# Altium PCB chavi-21.PcbDoc
Units mil, origin at the board's own origin, x right, y up, seen from the top; angles counter-clockwise.
Board outline 6000 x 4000 mil, 2 copper layers (Top Layer, Bottom Layer); 116 components, 79 nets, 381 pads, 0 vias.
Unrouted connection lines stored in the file: 264.
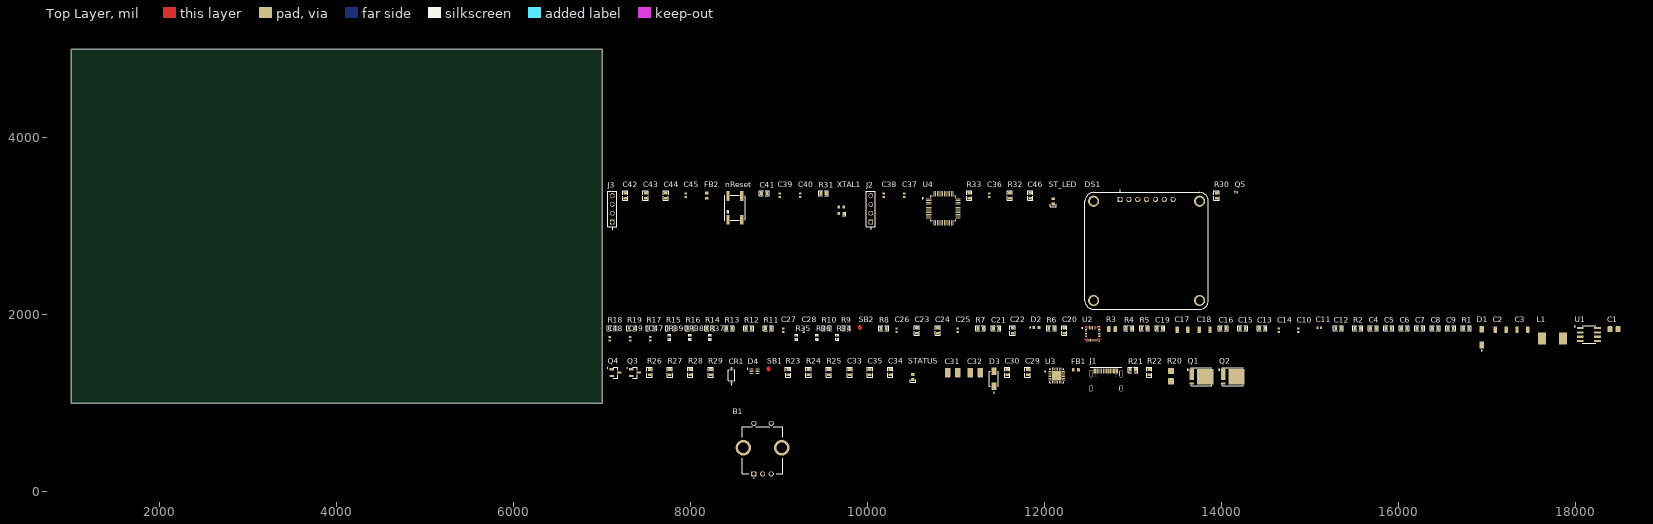
[diagram p0: Top Layer view]
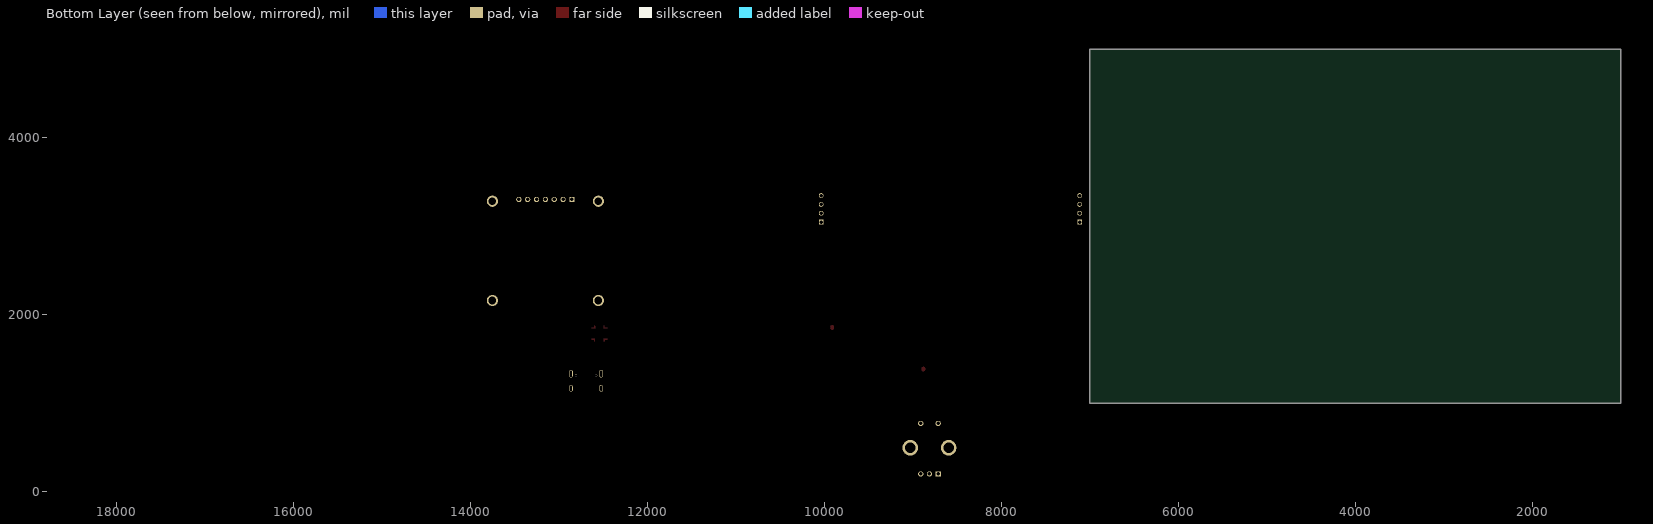
[diagram p1: Bottom Layer view, seen from below]

## Layer stack, top to bottom
Top Solder: solder mask 0.4, Solder Resist, Dk 3.5
Top Layer: signal copper 1.4
Dielectric 1: dielectric 12.6, FR-4, Dk 4.8
Bottom Layer: signal copper 1.4
Bottom Solder: solder mask 0.4, Solder Resist, Dk 3.5

## Board outline
1000,1000 7000,1000 7000,5000 1000,5000

## Design rules (kind name [scope] priority, off if disabled: settings)
Clearance [All] p1: gap=10 ignorepadtopadclearanceinfootprint=FALSE
DiffPairsRouting [All] p1: maxlimit=10 minlimit=10 mostfreqgap=10 toplayer_minwidth=15 toplayer_maxwidth=15 toplayer_prefwidth=15 bottomlayer_minwidth=15 bottomlayer_maxwidth=15 bottomlayer_prefwidth=15 maxuncoupledlength=500
PolygonConnect [All] p1: connectstyle=Relief reliefconductorwidth=10 reliefentries=4 polygonreliefangle="90 Angle" airgapwidth=10
RoutingVias [All] p1: holewidth=28 width=50 viastyle="Through Hole" minholewidth=28 minwidth=50 maxholewidth=28 maxwidth=50
SolderMaskExpansion [All] p1: expansion=4 istentingtop=FALSE
SupplyNets "Schematic Supply Nets_9" [InNet('VREG')] p1: voltage=0.000
SupplyNets "Schematic Supply Nets_8" [InNet('+VNEG')] p2: voltage=0.000
SupplyNets "Schematic Supply Nets_7" [InNet('GND')] p3: voltage=0.000
SupplyNets "Schematic Supply Nets_6" [InNet('+VBAT')] p4: voltage=0.000
SupplyNets "Schematic Supply Nets_5" [InNet('+3V3')] p5: voltage=0.000
SupplyNets "Schematic Supply Nets_4" [InNet('+PMID')] p6: voltage=0.000
SupplyNets "Schematic Supply Nets_3" [InNet('+VUSB')] p7: voltage=0.000
SupplyNets "Schematic Supply Nets_2" [InNet('+VSYS')] p8: voltage=0.000
SupplyNets "Schematic Supply Nets_1" [InNet('+V5')] p9: voltage=0.000
SupplyNets "Schematic Supply Nets" [InNet('+VOUT')] p10: voltage=0.000
Width [All] p1: maxlimit=10 minlimit=10 preferedwidth=10
29 further rules are at their usual default settings.

## Classes and differential pairs
component class stm32f103: B1 C36 C37 C38 C39 C40 C41 C42 C43 C44 C45 C46 C47 C48 C49 DS1 FB2 J2 J3 nReset Q5 R30 R31 R32 R33 R34 R35 R36 R37 R38 R39 ST_LED U4 XTAL1
component class bq25798: C1 C2 C3 C4 C5 C6 C7 C8 C9 C10 C11 C12 C13 C14 C15 C16 C17 C18 C19 C20 C21 C22 C23 C24 C25 C26 C27 C28 D1 D2 L1 L2 R1 R2 R3 R4 R5 R6 R7 R8 R9 R10 R11 R12 R13 R14 R15 R16 R17 R18 R19 SB2 U1 U2
component class ap33772s: C29 C30 C31 C32 C33 C34 C35 CR1 D3 D4 FB1 J1 Q1 Q2 Q3 Q4 R20 R21 R22 R23 R24 R25 R26 R27 R28 R29 SB1 STATUS U3
differential pair USB: +USB_P -USB_N

## Components (designator, comment, footprint, x,y, rotation, side; value= is the part's Value field where it differs from the comment)
B1 "EC11E18244AU" EC11E18244AU 8713.15,200 r0 top
C1 "100n 25V" CAP_0805 18430,1835 r0 top
C2 "47u 25V" CAP_1206 17150,1830 r0 top
C3 "47u 25V" CAP_1206 17395,1830 r0 top
C4 "10u 25V" CAP_0603 15710,1845 r0 top
C5 "10u 25V" CAP_0603 15885,1845 r0 top
C6 "10u 25V" CAP_0603 16060,1845 r0 top
C7 "10u 25V" CAP_0603 16235,1845 r0 top
C8 "10u 25V" CAP_0603 16410,1845 r0 top
C9 "10u 25V" CAP_0603 16585,1845 r0 top
C10 "100n 50V" CAP_0402 14865,1825 r90 top
C11 "100n 50V" CAP_0402 15100,1850 r0 top
C12 "10u 25V" CAP_0603 15315,1845 r0 top
C13 "1n" CAP_0603 14455,1845 r0 top
C14 "47p" CAP_0402 14645,1825 r90 top
C15 "47n 25V" CAP_0603 14235,1845 r0 top
C16 "47n 25V" CAP_0603 14015,1845 r0 top
C17 "4u7 50V" CAP_1206 13555,1830 r0 top
C18 "4u7 50V" CAP_1206 13805,1830 r0 top
C19 "10n" CAP_0603 13300,1845 r0 top
C20 "1n 25V" CAP_0603 12220,1820 r90 top
C21 "10u 25V" CAP_0603 11450,1845 r0 top
C22 "10u 25V" CAP_0603 11635,1820 r90 top
C23 "10u 25V" CAP_0603 10555,1820 r90 top
C24 "10u 25V" CAP_0603 10790,1820 r90 top
C25 "100n 50V" CAP_0402 11015,1825 r90 top
C26 "4u7 25V" CAP_0402 10325,1825 r90 top
C27 "100n 50V" CAP_0402 9045,1825 r90 top
C28 "100n 50V" CAP_0402 9275,1825 r90 top
C29 "100n X7R 50V" CAP_0603 11805,1350 r90 top
C30 "100n X7R 50V" CAP_0603 11575,1350 r90 top
C31 "10u X7R 50V" CAP_1210 10960,1345 r0 top
C32 "10u X7R 50V" CAP_1210 11215,1345 r0 top
C33 "100n X7R 50V" CAP_0603 9795,1350 r90 top
C34 "1u X7R 50V" CAP_0603 10255,1350 r90 top
C35 "100n X7R 50V" CAP_0603 10025,1350 r90 top
C36 "100n" CAP_0402 11370,3350 r90 top
C37 "10u" CAP_0402 10410,3350 r90 top
C38 "100n" CAP_0402 10180,3350 r90 top
C39 "10p" CAP_0402 9005,3350 r90 top
C40 "10p" CAP_0402 9235,3350 r90 top
C41 "100n" CAP_0603 8830,3370 r0 top
C42 "10n" CAP_0603 7260,3345 r90 top
C43 "1u" CAP_0603 7490,3345 r90 top
C44 "1u" CAP_0603 7720,3345 r90 top
C45 "100n" CAP_0402 7945,3350 r90 top
C46 "100n 50V" CAP_0603 11835,3345 r90 top
C47 "10n" CAP_0402 7545,1725 r90 top
C48 "10n" CAP_0402 7085,1725 r90 top
C49 "10n" CAP_0402 7315,1725 r90 top
CR1 "BAT48ZFILM" *SOD-123_STM 8460,1315 r90 top
D1 "Schottky Diode_3" DIOM5226X100N 16935,1745 r90 top
D2 "HSMA-C190" LED_HSMA-C190 11905,1855 r0 top
D3 "SS110" DIOM4325X250N 11425,1275 r90 top
D4 "SMF24CT1G" SOT65P210X110-6N 8720,1360 r0 top
DS1 "AOM12864A0-1.3BW-ANO" LCD_AOM12864A0-1.3BW-ANO 13150,2720 r0 top
FB1 "BLM18AG601SN1D" FB_0603 12350,1375 r0 top
FB2 "100R" FB_0603 8180,3345 r90 top
J1 "TYPE-C-31-M-12" TYPE-C-31-M-12 12690,1250 r0 top
J2 "st_debug" SAMTEC_TSW-104-08-T-S-LL 10035,3045 r90 top
J3 "uart_log" SAMTEC_TSW-104-08-T-S-LL 7115,3045 r90 top
L1 "6u8" ASPI-0630HI-6R8M-T15 17735,1730 r0 top
nReset "EVQQ2W03W" EVQQ2W03W 8500,3205 r0 top
Q1 "BSC019N06N" BSC014N04LSIATMA1 13770,1300 r0 top
Q2 "BSC019N06N" BSC014N04LSIATMA1 14125,1300 r0 top
Q3 "BSS138" SOT95P240X111-3N 7370,1345 r0 top
Q4 "BSS138" SOT95P240X111-3N 7150,1345 r0 top
Q5 "RV2C010UNT2L" DFN65P100X40-3L 14160,3380 r0 top
R1 "10k2" RES_0603 16760,1845 r0 top
R2 "332k" RES_0603 15535,1845 r0 top
R3 "68k1" RES_0805 12760,1835 r0 top
R4 "29.4k" RES_0603 12950,1845 r0 top
R5 "3k24" RES_0603 13125,1845 r0 top
R6 "1k2" RES_0603 12075,1845 r0 top
R7 "10k" RES_0603 11275,1845 r0 top
R8 "10k5 1%" RES_0603 10180,1845 r0 top
R9 "100R" RES_0603 9755,1845 r0 top
R10 "127k" RES_0603 9535,1845 r0 top
R11 "100k" RES_0603 8875,1845 r0 top
R12 "5k23" RES_0603 8655,1845 r0 top
R13 "30k1" RES_0603 8435,1845 r0 top
R14 "10k" RES_0603 8215,1845 r0 top
R15 "10k" RES_0603 7775,1845 r0 top
R16 "10k" RES_0603 7995,1845 r0 top
R17 "10k" RES_0603 7555,1845 r0 top
R18 "0R" RES_0603 7115,1845 r0 top
R19 "0R" RES_0603 7335,1845 r0 top
R20 "5m 1W 1%" RES_1206 13425,1305 r90 top
R21 "10R" RES_0603 12995,1375 r0 top
R22 "100R" RES_0603 13180,1350 r90 top
R23 "5k1" RES_0603 9100,1350 r90 top
R24 "5k1" RES_0603 9330,1350 r90 top
R25 "1k" RES_0603 9560,1350 r90 top
R26 "4k7" RES_0603 7535,1350 r90 top
R27 "4k7" RES_0603 7765,1350 r90 top
R28 "4k7" RES_0603 7995,1350 r90 top
R29 "4k7" RES_0603 8225,1350 r90 top
R30 "120R" RES_0603 13940,3345 r90 top
R31 "1k" RES_0603 9500,3370 r0 top
R32 "33R" RES_0603 11605,3345 r90 top
R33 "33R" RES_0603 11145,3345 r90 top
R34 "2k" RESC1005X04L 9655,1745 r90 top value=0R
R35 "10k" RESC1005X04L 9195,1745 r90 top value=0R
R36 "10k" RESC1005X04L 9425,1745 r90 top value=0R
R37 "470R" RESC1005X04L 8220,1745 r90 top value=0R
R38 "470R" RESC1005X04L 7990,1745 r90 top value=0R
R39 "470R" RESC1005X04L 7760,1745 r90 top value=0R
SB1 "Solderbridge" Solderbridge 8880,1385 r90 top
SB2 "Solderbridge" Solderbridge 9910,1855 r90 top
ST_LED "BLUE" LED_0603_BLUE 12095,3280 r90 top
STATUS "BLUE" LED_0603_BLUE 10510,1295 r90 top
U1 "TPS54331DR" SOIC127P599X175-8N 18145,1775 r0 top
U2 "BQ25798RQMR" IC_BQ25798RQMR 12540,1785 r0 top
U3 "AP33772S" IC_AP33772S 12135,1310 r0 top
U4 "STM32F103C8T6" QFP50P900X900X160-48N 10855,3200 r0 top
XTAL1 "16MHz" XTAL_2520 9700,3180 r90 top

## Footprints (in the part's own frame and the unit in brackets; to place one, negate y for a bottom-side part, rotate by r counter-clockwise, add the part's x,y. Pads: shape width x height; smd on the part's side, far side on the other; paste and mask are expansions set on the pad)
*SOD-123_STM [mil]
  rect 38x24 smd: 1(-73,0) 2(73,0)
  silkscreen extent -107,-39 61,39, body extent -74,-31 74,30, height 57
ASPI-0630HI-6R8M-T15 [mm]
  rect 2.35x3.4 smd: 1(-3.025,0) 2(3.025,0)
  body extent -3.6,-3.32 3.6,3.32, height 3.01
BSC014N04LSIATMA1 [mm]
  rect 1.2x3.3 smd paste-3 mask+0: 1(-2.775,0.66)
  rect 1.2x0.6 smd paste-2 mask-0.05: 4(-2.775,-1.96)
  rect 4.65x4.51 smd paste-3 mask+0: 5(1.05,-0.055)
  silkscreen extent -4.11,-2.58 3,2.58, body extent -3.03,-2.61 3,2.61, height 1.2
CAP_0402 [mm]
  rrect25% 0.6x0.7 smd: 1(-0.5,0) 2(0.5,0)
  body extent -0.5,-0.26 0.5,0.26, height 0.37
CAP_0603 [mm]
  rrect25% 0.8x1 smd: 1(-0.75,0) 2(0.75,0)
  silkscreen extent -1.4,-0.74 1.39,0.74, body extent -0.8,-0.4 0.8,0.4, height 0.51
CAP_0805 [mm]
  rrect25% 1.4x1.7 smd: 1(-1.143,0) 2(1.143,0)
  body extent -1.15,-0.76 1.15,0.79, height 1.01
CAP_1206 [mm]
  rrect25% 1x1.8 smd: 1(-1.55,0) 2(1.55,0)
  body extent -1.6,-0.8 1.6,0.8, height 0.94
CAP_1210 [mm]
  rrect25% 1.6x2.7 smd: 1(-1.4,0) 2(1.4,0)
  body extent -1.6,-1.25 1.6,1.25, height 2.5
DFN65P100X40-3L [mm]
  rect 0.4x0.25 smd mask+0.05: 1(-0.35,0.225) 2(-0.35,-0.225)
  rect 0.4x0.7 smd mask+0.065: 3(0.35,0)
  silkscreen extent -0.57,0.58 -0.48,0.67, body extent -0.53,-0.32 0.53,0.32, height 0.4
DIOM4325X250N [mm]
  rect 2.12x1.5 smd: A(2.115,0) C(-2.115,0)
  silkscreen extent -4.1,-1.28 2.16,1.28, body extent -2.6,-1.3 2.6,1.3, height 2.4
DIOM5226X100N [mm]
  rect 1.89x1.38 smd: A(2.24,0) K(-2.24,0)
  silkscreen extent -3.91,-0.1 -3.71,0.1, body extent -2.4,-1.15 2.3,1.35, height 1.1
EC11E18244AU [mm]
  rect 1.5x1.5 hole 1: A1(0,0)
  round 1.5 hole 1: B1(5,0) C1(2.5,0) D1(0,14.5) E1(5,14.5)
  round 4.5 hole 3: MH1(-3,7.5) MH2(8,7.5)
  silkscreen extent -3.35,-1.3 8.35,13.5, body extent -4.02,-0.25 9.08,14.7, height 24.5
EVQQ2W03W [mm]
  rect 1x2.8 smd: 1(-2,-3.4) 2(-2,3.4) 3(2,-3.4) 4(2,3.4)
  silkscreen extent -3,-3.62 3,3.6, body extent -2.97,-3.35 3.03,3.25, height 3.1
FB_0603 [mm]
  rrect25% 0.8x1 smd: 1(-0.75,0) 2(0.75,0)
  body extent -0.8,-0.4 0.8,0.4, height 0.81
IC_AP33772S [mm]
  rect 0.75x0.3 smd: 1(-1.925,1.25) 2(-1.925,0.75) 3(-1.925,0.25) 4(-1.925,-0.25) 5(-1.925,-0.75) 6(-1.925,-1.25) 13(1.925,-1.25) 14(1.925,-0.75) 15(1.925,-0.25) 16(1.925,0.25) 17(1.925,0.75) 18(1.925,1.25)
  rect 0.3x0.75 smd: 7(-1.25,-1.925) 8(-0.75,-1.925) 9(-0.25,-1.925) 10(0.25,-1.925) 11(0.75,-1.925) 12(1.25,-1.925) 19(1.25,1.925) 20(0.75,1.925) 21(0.25,1.925) 22(-0.25,1.925) 23(-0.75,1.925) 24(-1.25,1.925)
  rect 2.7x2.7 smd paste-0.5: 25(0,0)
  silkscreen extent -3.4,-2 2,2, body extent -1.97,-1.95 2.03,2.05, height 0.75
IC_BQ25798RQMR [mm]
  rrect50% 0.15x0.15 smd paste-1 mask+0: 1(-1.9,1.6) 9(-1.4,-1.85) 24(1.863,1.6)
  rrect50% 0.6x0.2 smd mask+0: 2(-1.9,1.2) 3(-1.9,0.8) 4(-1.9,0.4) 5(-1.9,0) 6(-1.9,-0.4) 7(-1.9,-0.8) 8(-1.9,-1.2) 20(1.9,0) 21(1.9,0.4) 22(1.9,0.8) 23(1.9,1.2)
  rrect50% 0.2x0.6 smd mask+0: 10(-1,-1.9) 11(-0.6,-1.9) 12(-0.2,-1.9) 13(0.2,-1.9) 14(0.6,-1.9) 15(1,-1.9)
  rrect50% 0.19x0.19 smd paste-1 mask+0: 16(1.85,-1.6)
  rrect50% 0.7x0.2 smd mask+0: 17(1.85,-1.2)
  rrect50% 0.65x0.2 smd mask+0: 18(1.875,-0.8)
  rrect50% 0.68x0.2 smd mask+0: 19(1.863,-0.4)
  rrect50% 0.2x1 smd mask+0: 25(0.9,1.7) 26(0.45,1.7) 27(0,1.7) 28(-0.45,1.7)
  rrect50% 0.2x0.95 smd mask+0: 29(-0.9,1.725)
  Top Layer region: 2.158,-1.501 2.16,-1.501 2.163,-1.502 2.165,-1.502 2.168,-1.503 2.17,-1.504 2.173,-1.505 2.175,-1.507 2.177,-1.508 2.179,-1.51 2.181,-1.511 2.183,-1.513 2.185,-1.515 2.187,-1.517 2.189,-1.519 2.19,-1.521 2.192,-1.523 2.193,-1.525 2.195,-1.527 2.196,-1.53 2.197,-1.532 2.198,-1.535 2.198,-1.537 2.199,-1.54 2.199,-1.542 2.2,-1.545 2.2,-1.547 2.2,-1.55 2.2,-1.65 2.2,-1.653 2.2,-1.655 2.199,-1.658 2.199,-1.66 2.198,-1.663 2.198,-1.665 2.197,-1.668 2.196,-1.67 2.195,-1.673 2.193,-1.675 2.192,-1.677 2.19,-1.679 2.189,-1.681 2.187,-1.683 2.185,-1.685 2.183,-1.687 2.181,-1.689 2.179,-1.69 2.177,-1.692 2.175,-1.693 2.173,-1.695 2.17,-1.696 2.168,-1.697 2.165,-1.698 2.163,-1.698 2.16,-1.699 2.158,-1.699 2.155,-1.7 1.5,-1.7 1.5,-2.15 1.5,-2.153 1.5,-2.155 1.499,-2.158 1.499,-2.16 1.498,-2.163 1.498,-2.165 1.497,-2.168 1.496,-2.17 1.495,-2.173 1.493,-2.175 1.492,-2.177 1.49,-2.179 1.489,-2.181 1.487,-2.183 1.485,-2.185 1.483,-2.187 1.481,-2.189 1.479,-2.19 1.477,-2.192 1.475,-2.193 1.473,-2.195 1.47,-2.196 1.468,-2.197 1.465,-2.198 1.463,-2.198 1.46,-2.199 1.458,-2.199 1.455,-2.2 1.345,-2.2 1.342,-2.199 1.34,-2.199 1.337,-2.198 1.335,-2.198 1.332,-2.197 1.33,-2.196 1.327,-2.195 1.325,-2.193 1.323,-2.192 1.321,-2.19 1.319,-2.189 1.317,-2.187 1.315,-2.185 1.313,-2.183 1.311,-2.181 1.31,-2.179 1.308,-2.177 1.307,-2.175 1.305,-2.173 1.304,-2.17 1.303,-2.168 1.302,-2.165 1.302,-2.163 1.301,-2.16 1.301,-2.158 1.3,-2.155 1.3,-2.153 1.3,-2.15 1.3,-1.55 1.3,-1.547 1.3,-1.545 1.301,-1.542 1.301,-1.54 1.302,-1.537 1.302,-1.535 1.303,-1.532 1.304,-1.53 1.305,-1.527 1.307,-1.525 1.308,-1.523 1.31,-1.521 1.311,-1.519 1.313,-1.517 1.315,-1.515 1.317,-1.513 1.319,-1.511 1.321,-1.51 1.323,-1.508 1.325,-1.507 1.327,-1.505 1.33,-1.504 1.332,-1.503 1.335,-1.502 1.337,-1.502 1.34,-1.501 1.342,-1.501 1.345,-1.5 2.155,-1.5
  Top Layer region: -1.342,-1.501 -1.34,-1.501 -1.337,-1.502 -1.335,-1.502 -1.332,-1.503 -1.33,-1.504 -1.327,-1.505 -1.325,-1.507 -1.323,-1.508 -1.321,-1.51 -1.319,-1.511 -1.317,-1.513 -1.315,-1.515 -1.313,-1.517 -1.311,-1.519 -1.31,-1.521 -1.308,-1.523 -1.307,-1.525 -1.305,-1.527 -1.304,-1.53 -1.303,-1.532 -1.302,-1.535 -1.302,-1.537 -1.301,-1.54 -1.301,-1.542 -1.3,-1.545 -1.3,-1.547 -1.3,-1.55 -1.3,-2.15 -1.3,-2.153 -1.3,-2.155 -1.301,-2.158 -1.301,-2.16 -1.302,-2.163 -1.302,-2.165 -1.303,-2.168 -1.304,-2.17 -1.305,-2.173 -1.307,-2.175 -1.308,-2.177 -1.31,-2.179 -1.311,-2.181 -1.313,-2.183 -1.315,-2.185 -1.317,-2.187 -1.319,-2.189 -1.321,-2.19 -1.323,-2.192 -1.325,-2.193 -1.327,-2.195 -1.33,-2.196 -1.332,-2.197 -1.335,-2.198 -1.337,-2.198 -1.34,-2.199 -1.342,-2.199 -1.345,-2.2 -1.455,-2.2 -1.458,-2.199 -1.46,-2.199 -1.463,-2.198 -1.465,-2.198 -1.468,-2.197 -1.47,-2.196 -1.473,-2.195 -1.475,-2.193 -1.477,-2.192 -1.479,-2.19 -1.481,-2.189 -1.483,-2.187 -1.485,-2.185 -1.487,-2.183 -1.489,-2.181 -1.49,-2.179 -1.492,-2.177 -1.493,-2.175 -1.495,-2.173 -1.496,-2.17 -1.497,-2.168 -1.498,-2.165 -1.498,-2.163 -1.499,-2.16 -1.499,-2.158 -1.5,-2.155 -1.5,-2.153 -1.5,-2.15 -1.5,-1.7 -2.155,-1.7 -2.158,-1.699 -2.16,-1.699 -2.163,-1.698 -2.165,-1.698 -2.168,-1.697 -2.17,-1.696 -2.173,-1.695 -2.175,-1.693 -2.177,-1.692 -2.179,-1.69 -2.181,-1.689 -2.183,-1.687 -2.185,-1.685 -2.187,-1.683 -2.189,-1.681 -2.19,-1.679 -2.192,-1.677 -2.193,-1.675 -2.195,-1.673 -2.196,-1.67 -2.197,-1.668 -2.198,-1.665 -2.198,-1.663 -2.199,-1.66 -2.199,-1.658 -2.2,-1.655 -2.2,-1.653 -2.2,-1.65 -2.2,-1.55 -2.2,-1.547 -2.2,-1.545 -2.199,-1.542 -2.199,-1.54 -2.198,-1.537 -2.198,-1.535 -2.197,-1.532 -2.196,-1.53 -2.195,-1.527 -2.193,-1.525 -2.192,-1.523 -2.19,-1.521 -2.189,-1.519 -2.187,-1.517 -2.185,-1.515 -2.183,-1.513 -2.181,-1.511 -2.179,-1.51 -2.177,-1.508 -2.175,-1.507 -2.173,-1.505 -2.17,-1.504 -2.168,-1.503 -2.165,-1.502 -2.163,-1.502 -2.16,-1.501 -2.158,-1.501 -2.155,-1.5 -1.345,-1.5
  Top Layer region: 1.408,2.199 1.41,2.199 1.413,2.198 1.415,2.198 1.418,2.197 1.42,2.196 1.423,2.195 1.425,2.193 1.427,2.192 1.429,2.19 1.431,2.189 1.433,2.187 1.435,2.185 1.437,2.183 1.439,2.181 1.44,2.179 1.442,2.177 1.443,2.175 1.445,2.173 1.446,2.17 1.447,2.168 1.448,2.165 1.448,2.163 1.449,2.16 1.449,2.158 1.45,2.155 1.45,2.153 1.45,2.15 1.45,1.7 2.155,1.7 2.158,1.699 2.16,1.699 2.163,1.698 2.165,1.698 2.168,1.697 2.17,1.696 2.173,1.695 2.175,1.693 2.177,1.692 2.179,1.69 2.181,1.689 2.183,1.687 2.185,1.685 2.187,1.683 2.189,1.681 2.19,1.679 2.192,1.677 2.193,1.675 2.195,1.673 2.196,1.67 2.197,1.668 2.198,1.665 2.198,1.663 2.199,1.66 2.199,1.658 2.2,1.655 2.2,1.653 2.2,1.65 2.2,1.55 2.2,1.547 2.2,1.545 2.199,1.542 2.199,1.54 2.198,1.537 2.198,1.535 2.197,1.532 2.196,1.53 2.195,1.527 2.193,1.525 2.192,1.523 2.19,1.521 2.189,1.519 2.187,1.517 2.185,1.515 2.183,1.513 2.181,1.511 2.179,1.51 2.177,1.508 2.175,1.507 2.173,1.505 2.17,1.504 2.168,1.503 2.165,1.502 2.163,1.502 2.16,1.501 2.158,1.501 2.155,1.5 1.295,1.5 1.292,1.501 1.29,1.501 1.287,1.502 1.285,1.502 1.282,1.503 1.28,1.504 1.277,1.505 1.275,1.507 1.273,1.508 1.271,1.51 1.269,1.511 1.267,1.513 1.265,1.515 1.263,1.517 1.261,1.519 1.26,1.521 1.258,1.523 1.257,1.525 1.255,1.527 1.254,1.53 1.253,1.532 1.252,1.535 1.252,1.537 1.251,1.54 1.251,1.542 1.25,1.545 1.25,1.547 1.25,1.55 1.25,2.15 1.25,2.153 1.25,2.155 1.251,2.158 1.251,2.16 1.252,2.163 1.252,2.165 1.253,2.168 1.254,2.17 1.255,2.173 1.257,2.175 1.258,2.177 1.26,2.179 1.261,2.181 1.263,2.183 1.265,2.185 1.267,2.187 1.269,2.189 1.271,2.19 1.273,2.192 1.275,2.193 1.277,2.195 1.28,2.196 1.282,2.197 1.285,2.198 1.287,2.198 1.29,2.199 1.292,2.199 1.295,2.2 1.405,2.2
  Top Layer region: -1.292,2.199 -1.29,2.199 -1.287,2.198 -1.285,2.198 -1.282,2.197 -1.28,2.196 -1.277,2.195 -1.275,2.193 -1.273,2.192 -1.271,2.19 -1.269,2.189 -1.267,2.187 -1.265,2.185 -1.263,2.183 -1.261,2.181 -1.26,2.179 -1.258,2.177 -1.257,2.175 -1.255,2.173 -1.254,2.17 -1.253,2.168 -1.252,2.165 -1.252,2.163 -1.251,2.16 -1.251,2.158 -1.25,2.155 -1.25,2.153 -1.25,2.15 -1.25,1.55 -1.25,1.547 -1.25,1.545 -1.251,1.542 -1.251,1.54 -1.252,1.537 -1.252,1.535 -1.253,1.532 -1.254,1.53 -1.255,1.527 -1.257,1.525 -1.258,1.523 -1.26,1.521 -1.261,1.519 -1.263,1.517 -1.265,1.515 -1.267,1.513 -1.269,1.511 -1.271,1.51 -1.273,1.508 -1.275,1.507 -1.277,1.505 -1.28,1.504 -1.282,1.503 -1.285,1.502 -1.287,1.502 -1.29,1.501 -1.292,1.501 -1.295,1.5 -2.155,1.5 -2.158,1.501 -2.16,1.501 -2.163,1.502 -2.165,1.502 -2.168,1.503 -2.17,1.504 -2.173,1.505 -2.175,1.507 -2.177,1.508 -2.179,1.51 -2.181,1.511 -2.183,1.513 -2.185,1.515 -2.187,1.517 -2.189,1.519 -2.19,1.521 -2.192,1.523 -2.193,1.525 -2.195,1.527 -2.196,1.53 -2.197,1.532 -2.198,1.535 -2.198,1.537 -2.199,1.54 -2.199,1.542 -2.2,1.545 -2.2,1.547 -2.2,1.55 -2.2,1.65 -2.2,1.653 -2.2,1.655 -2.199,1.658 -2.199,1.66 -2.198,1.663 -2.198,1.665 -2.197,1.668 -2.196,1.67 -2.195,1.673 -2.193,1.675 -2.192,1.677 -2.19,1.679 -2.189,1.681 -2.187,1.683 -2.185,1.685 -2.183,1.687 -2.181,1.689 -2.179,1.69 -2.177,1.692 -2.175,1.693 -2.173,1.695 -2.17,1.696 -2.168,1.697 -2.165,1.698 -2.163,1.698 -2.16,1.699 -2.158,1.699 -2.155,1.7 -1.45,1.7 -1.45,2.15 -1.45,2.153 -1.45,2.155 -1.449,2.158 -1.449,2.16 -1.448,2.163 -1.448,2.165 -1.447,2.168 -1.446,2.17 -1.445,2.173 -1.443,2.175 -1.442,2.177 -1.44,2.179 -1.439,2.181 -1.437,2.183 -1.435,2.185 -1.433,2.187 -1.431,2.189 -1.429,2.19 -1.427,2.192 -1.425,2.193 -1.423,2.195 -1.42,2.196 -1.418,2.197 -1.415,2.198 -1.413,2.198 -1.41,2.199 -1.408,2.199 -1.405,2.2 -1.295,2.2
  silkscreen extent -3.09,-2.07 2,2.07, body extent -2,-2 2,2, height 1
LCD_AOM12864A0-1.3BW-ANO [mm]
  rect 1.508x1.508 / inner round 1.508 / far side rect 1.508x1.508 hole 1 mask+0.102: 1(-7.62,14.75)
  round 1.508 hole 1 mask+0.102: 2(-5.08,14.75) 3(-2.54,14.75) 4(0,14.75) 5(2.54,14.75) 6(5.08,14.75) 7(7.62,14.75)
  round 3.216 hole 2.2 mask+0.102: SH1(-15.2,14.25) SH2(15.2,14.25) SH3(-15.2,-14.25) SH4(15.2,-14.25)
  silkscreen extent -17.7,-16.75 17.7,17.35, body extent -17.7,-16.75 17.7,16.75, height 5
LED_0603_BLUE [mm]
  rrect25% 0.8x1 smd: A(0.75,0) K(-0.75,0)
  silkscreen extent -1.5,-0.8 -0.8,0.8, body extent -0.8,-0.4 0.8,0.4, height 0.6
LED_HSMA-C190 [mm]
  rect 0.8x0.8 smd: A(0.75,0) K(-0.75,0)
  silkscreen extent -1.85,-0.1 -1.65,0.1, body extent -0.8,-0.3 0.8,0.3, height 1
QFP50P900X900X160-48N [mm]
  rrect50% 1.56x0.28 smd: 1(-4.18,2.75) 2(-4.18,2.25) 3(-4.18,1.75) 4(-4.18,1.25) 5(-4.18,0.75) 6(-4.18,0.25) 7(-4.18,-0.25) 8(-4.18,-0.75) 9(-4.18,-1.25) 10(-4.18,-1.75) 11(-4.18,-2.25) 12(-4.18,-2.75) 25(4.18,-2.75) 26(4.18,-2.25) 27(4.18,-1.75) 28(4.18,-1.25) 29(4.18,-0.75) 30(4.18,-0.25) 31(4.18,0.25) 32(4.18,0.75) 33(4.18,1.25) 34(4.18,1.75) 35(4.18,2.25) 36(4.18,2.75)
  rrect50% 0.28x1.56 smd: 13(-2.75,-4.18) 14(-2.25,-4.18) 15(-1.75,-4.18) 16(-1.25,-4.18) 17(-0.75,-4.18) 18(-0.25,-4.18) 19(0.25,-4.18) 20(0.75,-4.18) 21(1.25,-4.18) 22(1.75,-4.18) 23(2.25,-4.18) 24(2.75,-4.18) 37(2.75,4.18) 38(2.25,4.18) 39(1.75,4.18) 40(1.25,4.18) 41(0.75,4.18) 42(0.25,4.18) 43(-0.25,4.18) 44(-0.75,4.18) 45(-1.25,4.18) 46(-1.75,4.18) 47(-2.25,4.18) 48(-2.75,4.18)
  silkscreen extent -6.15,-3.6 3.6,3.6, body extent -4.5,-4.5 4.5,4.5, height 1.6
RES_0603 [mm]
  rrect25% 0.8x1 smd: 1(-0.75,0) 2(0.75,0)
  silkscreen extent -1.4,-0.75 1.39,0.74, body extent -0.8,-0.43 0.8,0.43, height 0.52
RES_0805 [mm]
  rrect25% 1x1.7 smd: 1(-0.95,0) 2(0.95,0)
  body extent -1,-0.63 1,0.63, height 0.47
RES_1206 [mm]
  rrect25% 1.8x1.84 smd: 1(-1.5,0) 2(1.5,0)
  body extent -1.6,-0.83 1.6,0.83, height 0.57
RESC1005X04L [mm]
  rect 0.6x0.55 smd mask+0.05: 1(-0.5,0) 2(0.5,0)
  silkscreen extent -0.87,-0.38 0.88,0.38, body extent -0.5,-0.25 0.5,0.25, height 0.3
SAMTEC_TSW-104-08-T-S-LL [mm]
  rect 1.37x1.37 hole 1.02: 01(0,0)
  round 1.37 hole 1.02: 02(2.54,0) 03(5.08,0) 04(7.62,0)
  silkscreen extent -2.02,-1.27 8.89,1.27
SOIC127P599X175-8N [mm]
  rrect25% 1.97x0.6 smd: 1(-2.47,1.905) 2(-2.47,0.635) 3(-2.47,-0.635) 4(-2.47,-1.905) 5(2.47,-1.905) 6(2.47,-0.635) 7(2.47,0.635) 8(2.47,1.905)
  silkscreen extent -4.14,-2.52 1.95,2.52, body extent -3,-2.45 3,2.45, height 1.75
Solderbridge [mil]
  round 1 smd paste+0: 1(-13.78,0) 2(13.78,0)
  Top Layer region: -7.49,19.36 -15.76,15.74 -21.55,8.8 -23.62,0 -23.62,0 -21.55,-8.79 -15.76,-15.74 -7.49,-19.36 -7.49,-19.36 -6.18,-19.31 -5.02,-18.71 -4.22,-17.68 -3.94,-16.4 -3.94,-16.4 -3.94,16.4 -4.22,17.68 -5.02,18.71 -6.18,19.31 -7.49,19.36
  Top Layer region: 7.49,-19.36 15.76,-15.74 21.55,-8.8 23.62,0 23.62,0 21.55,8.79 15.76,15.74 7.49,19.36 7.49,19.36 6.18,19.31 5.02,18.71 4.22,17.68 3.94,16.4 3.94,16.4 3.94,-16.4 4.22,-17.68 5.02,-18.71 6.18,-19.31 7.49,-19.36
SOT65P210X110-6N [mm]
  rect 1.17x0.4 smd: 1(-0.87,0.65) 2(-0.87,0) 3(-0.87,-0.65) 4(0.87,-0.65) 5(0.87,0) 6(0.87,0.65)
  silkscreen extent -2.11,0.61 -1.91,0.81, body extent -1.05,-1.07 1.05,1.07, height 1.1
SOT95P240X111-3N [mm]
  rrect25% 1.23x0.6 smd: 1(-1.06,0.95) 2(-1.06,-0.95) 3(1.06,0)
  silkscreen extent -2.35,-1.57 0.65,1.57, body extent -1.2,-1.45 1.2,1.45, height 1.11
TYPE-C-31-M-12 [mm]
  rect 0.6x1.5 smd mask+0.07: A1B12(-3.2,2.85) B1A12(3.2,2.85)
  rect 0.6x1.5 smd mask+0.14: A4B9(-2.4,2.85) B4A9(2.4,2.85)
  rect 0.3x1.5 smd mask+0.14: A5(-1.25,2.85) A6(-0.25,2.85) A7(0.25,2.85) A8(1.25,2.85) B5(1.75,2.85) B6(0.75,2.85) B7(-0.75,2.85) B8(-1.75,2.85)
  round 0.6 hole 0.6 unplated mask+0.3: MH(-2.9,1.6) MH(2.9,1.6)
  oval 1x1.9 hole 0.55 slot 1.45 at 90 deg mask+0.05: SH(-4.325,-2.1) SH(4.325,-2.1)
  oval 1x2.2 hole 0.55 slot 1.75 at 90 deg mask+0.05: SH(-4.325,2.1) SH(4.325,2.1)
  silkscreen extent -4.5,4 4.5,4, body extent -4.47,-4.65 4.47,3.25, height 3.32
XTAL_2520 [mm]
  rrect10% 0.9x0.8 smd mask+0: 1(-0.925,-0.725) 2(0.925,-0.725) 3(0.925,0.725) 4(-0.925,0.725)
  silkscreen extent -1.6,-1.33 -0.54,-0.36, body extent -1.25,-1 1.25,1, height 0.8

## Part data
B1: "Alps 18 Pulse Incremental Mechanical Rotary Encoder with a 6 mm Flat Shaft (Not Indexed), Through Hole 10mA 5V DC", Manufacturer_Name="ALPS Electric", Mouser Part Number=688-EC11E18244AU, Datasheet Link=https://tech.alpsalpine.com/cms.media/product_catalog_ec_01_ec11e_en_611f078659.pdf, Geometry.Height=24.5mm, Manufacturer_Part_Number=EC11E18244AU, Mouser Price/Stock=https://www.mouser.co.uk/ProductDetail/Alps-Alpine/EC11E18244AU?qs=YMSFtX0bdJDrS4vspzwcPg%3D%3D
C1: library part CAP_0805, "Capacitor SMD 0805"
C2 C3 C17 C18: library part CAP_1206, "Capacitor SMD 1206"
C4 C5 C6 C7 C8 C9 C12 C13 C15 C16 C19 C20 C21 C22 C23 C24 C29 C30 C33 C34 C35 C41 C42 C43 C44 C46: library part CAP_0603, "Capacitor SMD 0603"
C10 C11 C14 C25 C26 C27 C28 C36 C37 C38 C39 C40 C45 C47 C48 C49: library part CAP_0402, "Capacitor SMD 0402"
C31 C32: library part CAP_1210, "Capacitor SMD 1210"
CR1: "Diode Schottky 40 V 350mA (DC) Surface Mount SOD-123", Package="SOD-123 STMicroelectronics", Check_prices=https://www.snapeda.com/parts/BAT48ZFILM/STMicroelectronics/view-part/?ref=eda, MF=STMicroelectronics, MP=BAT48ZFILM, SnapEDA_Link=https://www.snapeda.com/parts/BAT48ZFILM/STMicroelectronics/view-part/?ref=snap
D1: "Schottky Diode SMD SMAF package"
D2: "20mA White Lens 90mcd 592nm Amber 170° 1.9V 0603 LED Indication - Discrete ROHS", Package=None, Availability=Unavailable, MP=HSMA-C190, Price=None
D3: "1A, 100V, Schottky Rectifier", Package="SMA-2 Taiwan Semiconductor", Check_prices=https://www.snapeda.com/parts/SS110/taiwan/view-part/?ref=eda, MF="Taiwan Semiconductor", MP=SS110, SnapEDA_Link=https://www.snapeda.com/parts/SS110/taiwan/view-part/?ref=snap
D4: "Quint Uni-Directional TVS Diode, 100W, 6-Pin SC-88", Package="TSSOP-6 ProTek Devices", Availability="In Stock", Check_prices=https://www.snapeda.com/parts/SMF05C/Protek+Devices/view-part/?ref=eda, MF="ProTek Devices", MP=SMF05C, Price=None, SnapEDA_Link=https://www.snapeda.com/parts/SMF05C/Protek+Devices/view-part/?ref=snap
DS1: "Non-Touch Graphic LCD Display Module - Blue OLED SPI 1.3 (33.02mm) 128 x 64", Package=None, Check_prices=https://www.snapeda.com/parts/AOM12864A0-1.3BW-ANO/Orient+Display/view-part/?ref=eda, MF="Orient Display", MP=AOM12864A0-1.3BW-ANO, SnapEDA_Link=https://www.snapeda.com/parts/AOM12864A0-1.3BW-ANO/Orient+Display/view-part/?ref=snap
FB1 FB2: library part FB_0603, "Ferrite Bead SMD 0603"
J1: "USB Type C Connector Horizontal SMT", Manufacturer="Koren Hroparts", Manufacturer Part Number=TYPE-C-31-M-12
J2 J3: library part 4PIN_TSW-104-08-T-S-LL, Package=None, Availability=Unavailable, MF=Samtec, MP=TSW-104-08-T-S-LL, Price=None
L1: library part ASPI-0630HI-6R8M-T15, "Inductor SMD 6.8uH 20% 8A Shielded", Manufacturer=ABRACON, Manufacturer Part Number=ASPI-0630HI-6R8M-T15
nReset: "White Push Plate Tactile Switch, SPST-NO 20 mA 3.1mm", Package=None, Availability="In Stock", Check_prices=https://www.snapeda.com/parts/EVQQ2W03W/Panasonic/view-part/?ref=eda, MF=Panasonic, MP=EVQQ2W03W, Price=None, SnapEDA_Link=https://www.snapeda.com/parts/EVQQ2W03W/Panasonic/view-part/?ref=snap
Q1 Q2: "N-Channel 60 V 100A (Ta) 136W (Ta) Surface Mount PG-TDSON-8 FL", Package="TO-252-3 Infineon", Check_prices=https://www.snapeda.com/parts/IPD122N10N3%20G/Infineon/view-part/?ref=eda, MF=Infineon, MP="IPD122N10N3 G", SnapEDA_Link=https://www.snapeda.com/parts/IPD122N10N3%20G/Infineon/view-part/?ref=snap
Q3 Q4: "N-Channel 50 V 220mA (Ta) 350mW (Ta) Surface Mount SOT-23-3", Package="SOT-23-3 ON Semiconductor", Check_prices=https://www.snapeda.com/parts/BSS138/Onsemi/view-part/?ref=eda, MF=onsemi, MP=BSS138, SnapEDA_Link=https://www.snapeda.com/parts/BSS138/Onsemi/view-part/?ref=snap
Q5: "N-Channel MOSFET, 20V, 1A, 470mOhm, 400mW", Manufacturer="Rohm Semiconductor", Part number IPS=00000009976, Part number NEMS=101300132, Part number Norautron=26320026, Supplier Part Number 1=RV2C010UNT2LCT-ND, Artikkelnr Noca=35010020, Author=rsk, Component Class=Semiconductors, Component Status=Active, ComponentLink1Description=Datasheet, ComponentLink1URL=N.A., ComponentLink2Description="Supplier link", ComponentLink2URL=N.A., Footprint Doc=DFN-3, HelpURL=http://rohmfs.rohm.com/en/products/databook/datasheet/discrete/transistor/mosfet/rv2c010unt2l-e.pdf, LatestRevisionDate=2016-08-09, Manufacturer Part Number=RV2C010UNT2L, Note=N.A., Pad Count=3, Part Number=RV2C010UNT2L, PartId=101300132, Published=2016-08-09, Supplier 1=Digi-Key, Supplier 2=Mouser, Supplier Part Number 2=755-RV2C010UNT2L
R1 R2 R4 R5 R6 R7 R8 R9 R10 R11 R12 R13 R14 R15 R16 R17 R18 R19 R21 R22 R23 R24 R25 R26 R27 R28 R29 R30 R31 R32 R33: library part RES_0603, "Resistor SMD 0603"
R3: library part RES_0805, "Resistor SMD 0805"
R20: library part RES_1206, "Resistor SMD 1206"
R34 R35 R36 R37 R38 R39: library part R0402-0R, "Resistor, ±5%, 0.063W", Manufacturer=N.A., Part number IPS=00000007128, Part number NEMS=100100109, Supplier Part Number 1=146-9661, Artikkelnr Noca=27049000, Author=rsk, Component Class=Resistors, Component Status=Active, ComponentLink1Description=Datasheet, ComponentLink1URL=N.A., ComponentLink2Description="Supplier link", ComponentLink2URL=N.A., Footprint Doc=0402, HelpURL=N.A., LatestRevisionDate=2009-11-23, Manufacturer Part Number=N.A., Note="Chip Res 5%", Pad Count=2, Part Number=R0402-0R, Part number Norautron=N.A., PartId=100100109, Published=2009-05-08, Supplier 1=Farnell, Supplier 2=N.A., Supplier Part Number 2=N.A.
SB1 SB2: Manufacturer=N.A., Part number NEMS=100500458, Artikkelnr Noca=N.A., Author=rsk, Component Class=Connectors, Component Status=Active, ComponentLink1Description=Datasheet, ComponentLink1URL=N.A., ComponentLink2Description="Supplier link", ComponentLink2URL=N.A., Footprint Doc=Solderbridge, HelpURL=N.A., LatestRevisionDate=2009-12-14, Manufacturer Part Number=N.A., Note=N.A., Pad Count=2, Part Number=Solderbridge, Part number IPS=N.A., Part number Norautron=N.A., PartId=100500458, Published=2009-12-14, Supplier 1=N.A., Supplier 2=N.A., Supplier Part Number 1=N.A., Supplier Part Number 2=N.A., System=Connector
ST_LED STATUS: library part LED_0603_BLUE, "LED 0603 BLUE SMD"
U2: "IÂ²C controlled, 1-4-cell, 5-A buck-boost solar battery charger with dual-input selector and MPPT", Package="VFQFN-29 Texas Instruments", Check_prices=https://www.snapeda.com/parts/BQ25798RQMR/Texas+Instruments/view-part/?ref=eda, MF="Texas Instruments", MP=BQ25798RQMR, SnapEDA_Link=https://www.snapeda.com/parts/BQ25798RQMR/Texas+Instruments/view-part/?ref=snap
U3: "USB Controller, PD Sink USB 3.0 USB Interface W-QFN4040-24 (Type A1)", Package=None, Availability="In Stock", Check_prices=https://www.snapeda.com/parts/AP33771DKZ-13/Diodes+Inc./view-part/?ref=eda, MF="Diodes Incorporated", MP=AP33771DKZ-13, Price=None, Purchase-URL=https://pricing.snapeda.com/search?q=AP33771DKZ-13&ref=eda, SnapEDA_Link=https://www.snapeda.com/parts/AP33771DKZ-13/Diodes+Inc./view-part/?ref=snap
U4: "ARMÂ® CortexÂ®-M3 STM32F1 Microcontroller IC 32-Bit 72MHz 64KB (64K x 8) FLASH 48-LQFP (7x7)", Package="LQFP-48 STMicroelectronics", Availability="In Stock", Check_prices=https://www.snapeda.com/parts/STM32F103C8T6/STMicroelectronics/view-part/?ref=eda, MF=STMicroelectronics, MP=STM32F103C8T6, Price=None, Purchase-URL=https://pricing.snapeda.com/search/part/STM32F103C8T6/?ref=eda, SnapEDA_Link=https://www.snapeda.com/parts/STM32F103C8T6/STMicroelectronics/view-part/?ref=snap
XTAL1: library part XTAL_2520, "Crystal SMD 2520"

## Nets (pads, with @x,y where several pads share a name; then routed paths per layer and width w, separated by ;. In a path a pad name is that pad's centre, name@x,y a point inside that pad or via, vN(x,y) a via of type N, cw(c..) or ccw(c..) an arc to the next point about the centre after c; other vN are vias at no path point)
+3V3: C2.2 C3.2 C36.2 C37.2 C38.1 C44.2 C45.2 C46.2 CR1.2 DS1.2 FB2.2 J2.01 J3.01 L1.2 R1.2 R7.2 R14.2 R17.1 R30.2 R31.1 R34.2 R35.2 R36.2 U4.1 U4.24 U4.36 U4.48
+3V3_SPD: CR1.1 Q3.1 Q4.1 R28.2 R29.2
+PMID: C4.2 C5.2 C6.2 C10.2 U2.29
+V5: C34.2 R26.2 R27.2 U3.20
+VBAT: C21.2 C22.2 D4.6 R9.2 U2.22 U2.23
+VBUS: C29.1 D3.C FB1.1 J1.A4B9 J1.B4A9
+VNEG: C23.2 C24.2 C25.2 C27.2 C28.2 C32.2 Q2.1 R22.2 SB1.1 U2.2 U2.3 U2.8 U2.9
+VOUT: SB1.2 SB2.1
+VSYS: C7.2 C8.2 C9.2 C11.2 C12.2 C17.2 C18.2 R2.2 SB2.2 U1.2 U2.25
+VUSB: C30.1 C31.2 FB1.2 R20.1 U3.1
_OLED_CLK: DS1.3 R32.2
_OLED_MOSI: DS1.4 R33.2
_SCL_BQ: R17.2 R18.1 U2.14
_SDA_BQ: R14.1 R19.2 U2.15
BATP: R9.1 U2.18
BOOT: C1.1 U1.1
BTST1: C15.1 U2.4
BTST2: C16.1 U2.19
C\E\\: R16.2 U2.13
COMP: C13.2 C14.2 U1.6
DRN: Q1.5 Q2.5
EN: R2.1 R3.2 U1.3
GND: B1.C1 B1.D1 B1.MH1 B1.MH2 C2.1 C3.1 C4.1 C5.1 C6.1 C7.1 C8.1 C9.1 C10.1 C11.1 C12.1 C14.1 C17.1 C18.1 C19.1 C20.2 C21.1 C22.1 C23.1 C24.1 C25.1 C26.2 C27.1 C28.1 C29.2 C30.2 C31.1 C32.1 C33.2 C34.1 C35.2 C36.1 C37.1 C38.2 C39.1 C40.1 C41.1 C42.1 C43.1 C44.1 C45.1 C46.1 C47.1 C48.1 C49.1 D1.A D3.A D4.2 DS1.1 J1.A1B12 J1.B1A12 J1.SH J2.04 J3.04 nReset.3 nReset.4 Q5.2 R3.1 R4.1 R5.1 R8.1 R11.1 R13.1 R15.1 R16.1 R23.1 R24.1 R25.2 U1.7 U2.10 U2.11 U2.27 U3.3 U3.25 U4.8 U4.23 U4.35 U4.47 XTAL1.2 XTAL1.4
IFB: C35.1 U3.15
ILIM: R10.1 R11.2 U2.17
INT_BQ: R7.1 U2.21 U4.25
KEY_0: C47.2 R34.1 R39.2 U4.10
NetB1_A1: B1.A1 R37.2
NetB1_B1: B1.B1 R38.2
NetB1_E1: B1.E1 R39.1
NetC13_1: C13.1 R4.2
NetD2_A: D2.A R6.2
NetQ5_3: Q5.3 ST_LED.K
NetR21_1: R21.1 U3.23
NetR22_1: R22.1 U3.22
NetR25_1: R25.1 STATUS.K
NetR30_1: R30.1 ST_LED.A
nRESET: C41.2 nReset.1 nReset.2 R31.2 U4.7
OLED_CLK: R32.1 U4.15
OLED_CS: DS1.7 U4.14
OLED_DC: DS1.6 U4.29
OLED_MOSI: R33.1 U4.16 U4.17
OLED_RST: DS1.5 U4.30
OSC_IN: C39.2 U4.5 XTAL1.3
OSC_OUT: C40.2 U4.6 XTAL1.1
PD_CC1: D4.1 J1.A5 R24.2 U3.17
PD_CC2: D4.3 J1.B5 R23.2 U3.16
PH: C1.2 D1.K L1.1 U1.8
PROG: R8.2 U2.20
PWR_EN: Q1.4 Q2.4 R21.2
Q\O\N\\: R15.2 U2.12
RX: J3.03 U4.13
S_A: C48.2 R35.1 R37.1 U4.27
S_B: C49.2 R36.1 R38.1 U4.26
SCL_BQ: R18.2 U4.21
SCL_PD_3V3: Q4.2 R29.1 U4.42
SCL_PD_5V: Q4.3 R26.1 U3.5
SDA_BQ: R19.1 U4.22
SDA_PD_3V3: Q3.2 R28.1 U4.43
SDA_PD_5V: Q3.3 R27.1 U3.4
SDRV: C20.1 U2.24
SENSE: R1.1 R5.2 U1.5
SS: C19.2 U1.4
ST_LED: Q5.1 U4.45
STAT: D2.K U2.1
SW1: C15.2 U2.28
SW2: C16.2 U2.26
SWCLK: J2.03 U4.37
SWDIO: J2.02 U4.34
TS: R12.1 R13.2 U2.16
TX: J3.02 U4.12
USB_N: U4.32
USB_P: D4.5 J1.A6 J1.B6
USB_PD_INT: U3.9 U4.41
USB_PD_LED: STATUS.A U3.8
V18: C33.1 U3.12
VBUS: Q1.1 R20.2 U3.24
VDDA: C42.2 C43.2 FB2.1 U4.9
VREG: C26.1 R6.1 R10.2 R12.2 U2.5
pads on no net: D4.4 DS1.SH1 DS1.SH2 DS1.SH3 DS1.SH4 J1.A7 J1.A8 J1.B7 J1.B8 J1.MH U2.6 U2.7 U3.2 U3.6 U3.7 U3.10 U3.11 U3.13 U3.14 U3.18 U3.19 U3.21 U4.2 U4.3 U4.4 U4.11 U4.18 U4.19 U4.20 U4.28 U4.31 U4.33 U4.38 U4.39 U4.40 U4.44 U4.46

## Text inside footprints (layer, text, board x,y; h text height)
ST_LED: Mechanical 13 "+" at 12071.04,3331.84 h19.68 r90
STATUS: Mechanical 13 "+" at 10486.04,1346.84 h19.68 r90